# EAGLE board TempControl_V1.0 (EAGLE 8.5.0)
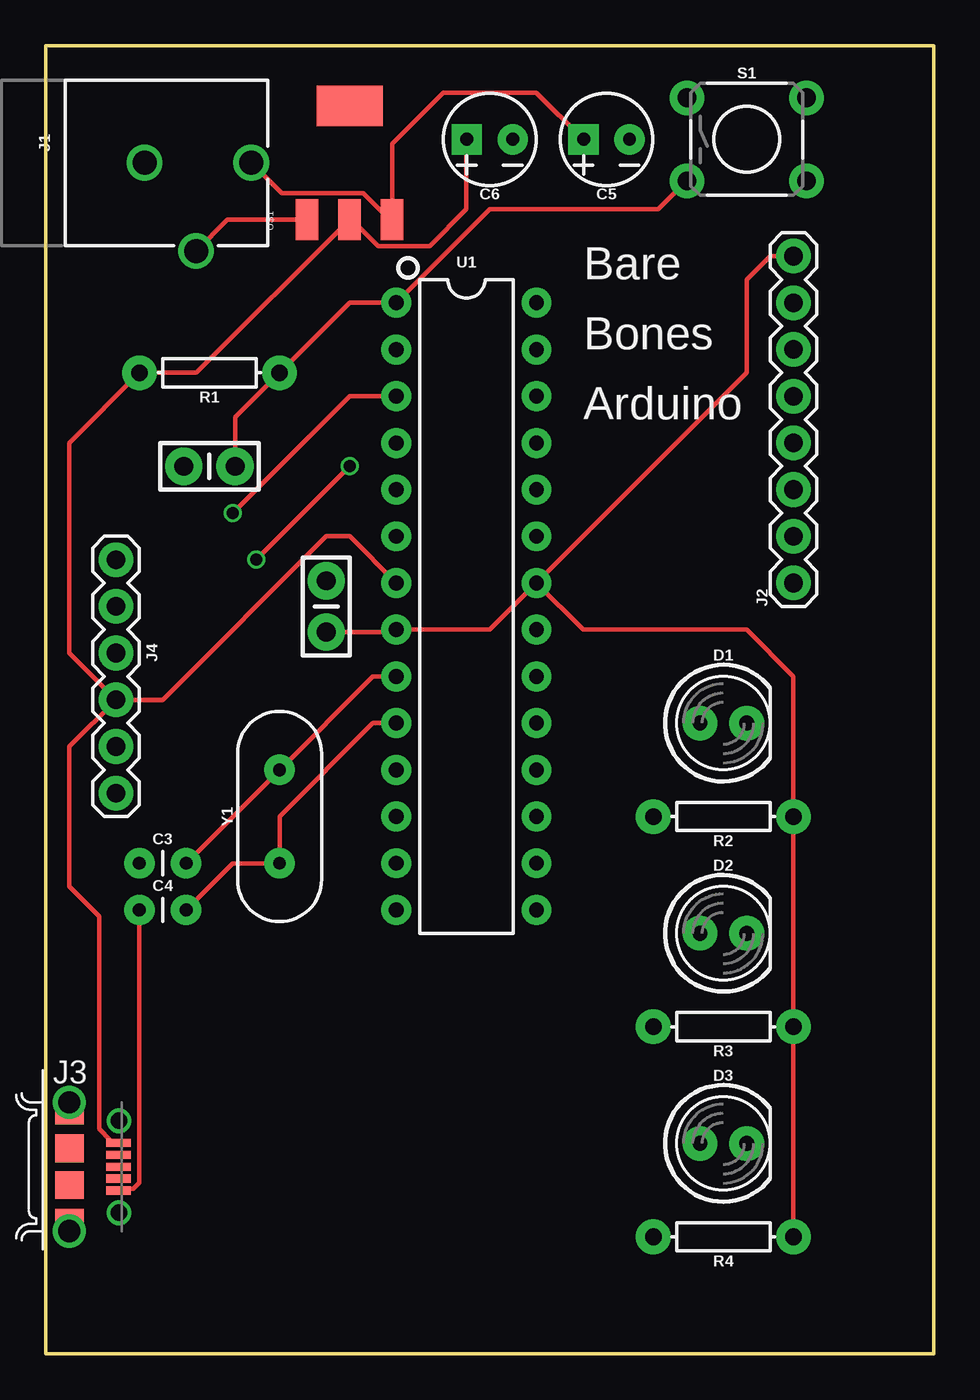
[diagram p0: board, top side]
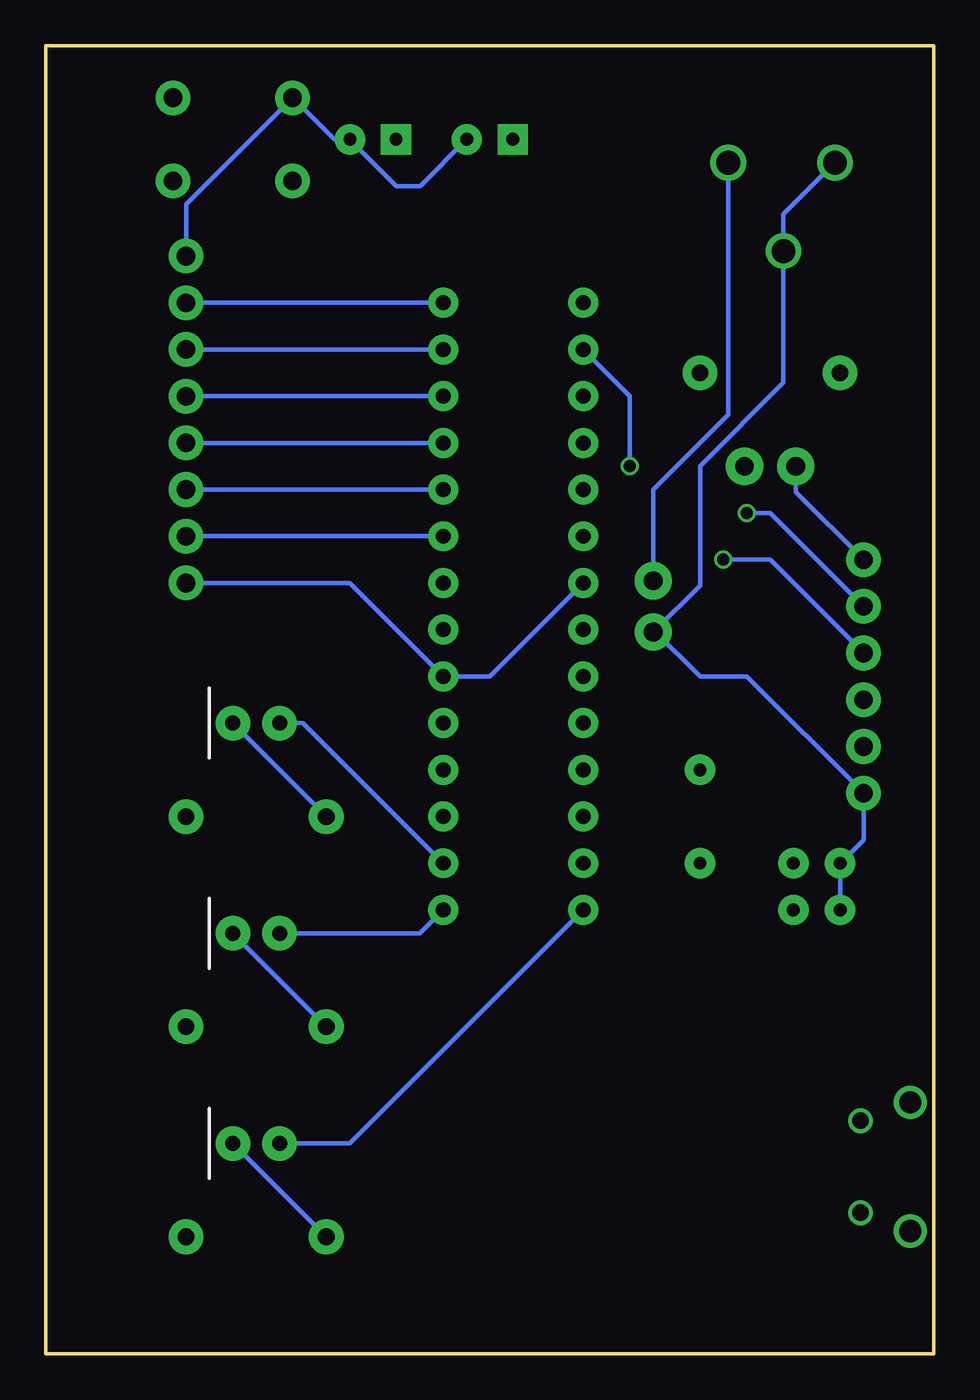
[diagram p1: board, bottom side, seen from below]

Size 48.26 x 71.12 mm. Coordinates in mm from the lower left corner, seen from the top.
Outline: 0,71.12 48.26,71.12 48.26,0 0,0 0,71.12
Copper layers (1*16): Top 0.035559375mm / dielectric 1.6mm / Bottom 0.035559375mm
Design rules "oshpark-2layer": minimum track width 6mil, minimum drill 10mil, track to track 6mil, track to pad 6mil, pad to pad 6mil, via to via 6mil, smd to smd 6mil, copper to edge 15mil, drill to drill 6mil, minimum pad ring 5mil, minimum via ring 5mil, stop-mask expansion 2.5mil, vias tented up to drill 0mil, thermal gap 10mil

## Footprints (pad centres in the part's own frame; a part is rotated, then mirrored left to right if it is on the bottom)
CAP-PTH-SMALL-KIT = drill 1.016 pad 2.032: 1 -1.397,0; 2 1.397,0
CAP-PTH-2.54 = drill 0.7 pad 1.651: 1 -1.27,0; 2 1.27,0
CPOL-RADIAL-2.5MM-5MM = drill 0.7 pad 1.651 square: 1 1.25,0 | drill 0.7 pad 1.651: 2 -1.25,0
LED_5MM = drill 0.813 pad 1.88: A -1.27,0; K 1.27,0
SPARKFUN-CONNECTORS_POWER_JACK_PTH_BREAD = drill 1.3: GND 0,7.9; GNDBREAK 4.8,10.7; PWR 0,13.7
1X08 = drill 1.016 pad 1.88: 1 0,0; 2 2.54,0; 3 5.08,0; 4 7.62,0; 5 10.16,0; 6 12.7,0; 7 15.24,0; 8 17.78,0
FRAMATOME_10118194-0001LF = smd 0.45 x 1.35: 1 -1.3,2.675; 2 -0.65,2.675; 3 0,2.675; 4 0.65,2.675; 5 1.3,2.675 | drill 0.9: P$6 -2.5,2.7; P$7 2.5,2.7 | drill 1.2: P$8 -3.5,0; P$9 3.5,0 | smd 1.5 x 1.55: P$10 -1,0; P$11 1,0; P$12 -3.05,0; P$13 3.05,0
FTDI_BASIC = drill 1.016 pad 1.88: CTS 10.16,0; DTR 0,0; GND 12.7,0; RXI 2.54,0; TXO 5.08,0; VCC 7.62,0
OLED_128_32 = drill 1.016 square: 1 0,0 | drill 1.016: 2 0,2.54; 3 0,5.08; 4 0,7.62
AXIAL-0.3 = drill 0.9 pad 1.88: P$1 -3.81,0; P$2 3.81,0
TACTILE_SWITCH_PTH_6.0MM = drill 1.016 pad 1.88: 1 -3.251,2.261; 2 3.251,2.261; 3 -3.251,-2.261; 4 3.251,-2.261
DIP28 = drill 0.813 pad 1.626: 1 -16.51,-3.81; 2 -13.97,-3.81; 3 -11.43,-3.81; 4 -8.89,-3.81; 5 -6.35,-3.81; 6 -3.81,-3.81; 7 -1.27,-3.81; 8 1.27,-3.81; 9 3.81,-3.81; 10 6.35,-3.81; 11 8.89,-3.81; 12 11.43,-3.81; 13 13.97,-3.81; 14 16.51,-3.81; 15 16.51,3.81; 16 13.97,3.81; 17 11.43,3.81; 18 8.89,3.81; 19 6.35,3.81; 20 3.81,3.81; 21 1.27,3.81; 22 -1.27,3.81; 23 -3.81,3.81; 24 -6.35,3.81; 25 -8.89,3.81; 26 -11.43,3.81; 27 -13.97,3.81; 28 -16.51,3.81
SOT223 = smd 2.235 x 1.219: 1 -3.099,2.311; 2 -3.099,0; 3 -3.099,-2.311 | smd 2.2 x 3.6: 4 3.099,0
HC49US = drill 0.7 pad 1.651: 1 -2.54,0; 2 2.54,0

## Placement (x,y rotation side)
C1  0.1uF  [CAP-PTH-SMALL-KIT]  15.24,40.64 270 top
C2  0.1uF  [CAP-PTH-SMALL-KIT]  8.89,48.26 0 top
C3  22pF  [CAP-PTH-2.54]  6.35,26.67 0 top
C4  22pF  [CAP-PTH-2.54]  6.35,24.13 0 top
C5  10uF  [CPOL-RADIAL-2.5MM-5MM]  30.48,66.04 180 top
C6  10uF  [CPOL-RADIAL-2.5MM-5MM]  24.13,66.04 180 top
D1  [LED_5MM]  36.83,34.29 0 top
D2  [LED_5MM]  36.83,22.86 0 top
D3  [LED_5MM]  36.83,11.43 0 top
J1  SPARKFUN-CONNECTORS_POWER_JACKPTH_BREAD  [SPARKFUN-CONNECTORS_POWER_JACK_PTH_BREAD]  -2.54,64.77 270 top
J2  [1X08]  40.64,41.91 90 top
J3  10118194-0001LF  [FRAMATOME_10118194-0001LF]  1.27,10.16 270 top
J4  6_PIN_SERIAL_CABLEPTH  [FTDI_BASIC]  3.81,43.18 270 top
J5  OLED_128_32  [OLED_128_32]  5.08,-15.24 0 top  (outside the outline)
R1  10k  [AXIAL-0.3]  8.89,53.34 180 top
R2  10k  [AXIAL-0.3]  36.83,29.21 180 top
R3  10k  [AXIAL-0.3]  36.83,17.78 180 top
R4  10k  [AXIAL-0.3]  36.83,6.35 180 top
S1  MOMENTARY-SWITCH-SPST-PTH-6.0MM  [TACTILE_SWITCH_PTH_6.0MM]  38.1,66.04 0 top
U1  328P  [DIP28]  22.86,40.64 270 top
U$1  AMS1117-5.0  [SOT223]  16.51,64.77 90 top
Y1  16MHz  [HC49US]  12.7,29.21 90 top

## Library data of the parts
C1 C2 = SparkFun-Capacitors; PROD_ID: CAP-08370
C3 C4 = SparkFun-Capacitors; PROD_ID: CAP-09128
C5 C6 = SparkFun-Capacitors; PROD_ID: CAP-08440
D1-D3 = SparkFun-LED
J1 = BarnabasRobotics; PROD_ID: PRT-10811
J2 = SparkFun-Connectors; PROD_ID: CONN-08438
J3 = mini USB; AVAILABILITY: Good; DESCRIPTION: Conn Micro USB Type B RCP 5 POS 0.65mm Solder RA SMD 5 Terminal 1 Port T/R; MF: Amphenol; MP: 10118194-0001LF; PACKAGE: DIP-4 FCI; PRICE: 0.24 USD
J4 = SparkFun-Connectors
J5 = BarnabasRobotics
R1-R4 = SparkFun-Resistors; PROD_ID: RES-12183
S1 = SparkFun-Switches; PROD_ID: SWCH-08441; SF_SKU: COM-00097
U1 = SparkFun-IC-Microcontroller; PROD_ID: IC-09136
U$1 = AMS1117-5.0; AVAILABILITY: Unavailable; DESCRIPTION: Sot-223; MF: ams; MP: AMS1117-5.0; PACKAGE: SOT-223 ams; PRICE: 0.09 USD
Y1 = SparkFun-Clocks; PROD_ID: XTAL-08181; SF_ID: COM-00536

## Nets
CTS: J4.CTS
DTR: C2.1 J4.DTR
GND: C1.2 C3.1 C4.1 C5.2 C6.2 J1.GND J1.GNDBREAK J2.8 J3.5 J4.GND R2.P$1 R3.P$1 R4.P$1 S1.1 U1.8 U1.22 U$1.1
N$1: J2.2 U1.23
N$2: J2.3 U1.24
N$3: J2.4 U1.25
N$4: J2.5 U1.26
N$5: J2.6 U1.27
N$6: J2.7 U1.28
N$7: C3.2 U1.9 Y1.2
N$8: D3.A U1.14
N$9: D2.A U1.15
N$10: D1.A U1.16
N$11: D3.K R4.P$2
N$12: D2.K R3.P$2
N$13: D1.K R2.P$2
N$14: C4.2 U1.10 Y1.1
N$15: C1.1 C5.1 J1.PWR U$1.3
RESET: C2.2 R1.P$1 S1.3 U1.1
RX: J4.TXO U1.2
TX: J4.RXI U1.3
VCC: C6.1 J2.1 J3.1 J4.VCC R1.P$2 U1.7 U1.20 U$1.2

## Tracks (layer width: path | path; a pad name or v marks a point on that pad's centre or on a via)
DTR
  Bottom 0.254: C2.1 7.49,46.86 J4.DTR
GND
  Top 0.254: C1.2 18.92,39.24 U1.8 24.13,39.37 U1.22 | U1.22 38.1,53.34 38.1,58.42 39.37,59.69 J2.8 | R4.P$1 R3.P$1 R2.P$1 40.64,36.83 38.1,39.37 29.21,39.37 U1.22 | J3.5 4.04,8.96 4.76,8.96 5.08,9.28 C4.1 | J1.GNDBREAK 9.86,61.67 U$1.1
  Bottom 0.254: 15.18,39.31 12.7,41.78 12.7,48.26 8.16,52.8 J1.GNDBREAK 8.16,61.97 J1.GND | 15.18,39.31 C1.2 | 15.18,39.31 12.7,36.83 10.16,36.83 J4.GND 3.81,27.94 C3.1 C4.1 | C6.2 27.92,63.5 29.21,63.5 31.73,66.02 C5.2 32.59,66.04 S1.1 40.64,62.51 J2.8
N$1
  Bottom 0.254: U1.23 J2.2
N$2
  Bottom 0.254: U1.24 J2.3
N$3
  Bottom 0.254: U1.25 J2.4
N$4
  Bottom 0.254: U1.26 J2.5
N$5
  Bottom 0.254: U1.27 J2.6
N$6
  Bottom 0.254: U1.28 J2.7
N$7
  Top 0.254: U1.9 17.78,36.83 Y1.2 C3.2
N$8
  Bottom 0.254: U1.14 31.75,11.43 D3.A
N$9
  Bottom 0.254: U1.15 27.94,22.86 D2.A
N$10
  Bottom 0.254: U1.16 34.29,34.29 D1.A
N$11
  Bottom 0.254: D3.K R4.P$2
N$12
  Bottom 0.254: D2.K R3.P$2
N$13
  Bottom 0.254: D1.K R2.P$2
N$14
  Top 0.254: U1.10 17.78,34.29 12.7,29.21 Y1.1 10.16,26.67 C4.2
N$15
  Top 0.254: J1.PWR 12.81,63.12 17.26,63.12 18.7,61.67 U$1.3 18.82,65.81 21.59,68.58 26.67,68.58 29.21,66.04 C5.1
  Bottom 0.254: C1.1 15.24,46.99 11.16,51.07 J1.PWR
RESET
  Top 0.254: C2.2 10.29,50.93 R1.P$1 16.51,57.15 U1.1 24.13,62.23 33.3,62.23 S1.3
RX  (via drill 0.65)
  Top 0.254: v11.43,43.18 v16.51,48.26
  Bottom 0.254: J4.TXO 8.89,43.18 v11.43,43.18 | v16.51,48.26 16.51,52.07 U1.2
TX  (via drill 0.65)
  Top 0.254: v10.16,45.72 16.51,52.07 U1.3
  Bottom 0.254: J4.RXI 8.89,45.72 v10.16,45.72
VCC
  Top 0.254: J4.VCC 1.27,33.02 1.27,25.4 2.88,23.79 2.88,12.21 3.52,11.57 3.83,11.57 J3.1 | J4.VCC 1.27,38.1 1.27,49.53 R1.P$2 8.18,53.34 U$1.2 16.63,61.67 18.07,60.22 20.85,60.22 22.86,62.23 22.86,66.02 C6.1 | J4.VCC 6.35,35.56 15.24,44.45 16.51,44.45 U1.7
  Bottom 0.254: J2.1 31.75,41.91 U1.20 24.13,36.83 U1.7

## Text on the board
tPlace: Bare | Bones | Arduino